# Altium PCB PCB1.PcbDoc
Units mm, origin at the board's own origin, x right, y up, seen from the top; angles counter-clockwise.
Board outline 30.73 x 53.09 mm, 2 copper layers (Top Layer, Bottom Layer); 47 components, 62 nets, 201 pads, 54 vias.
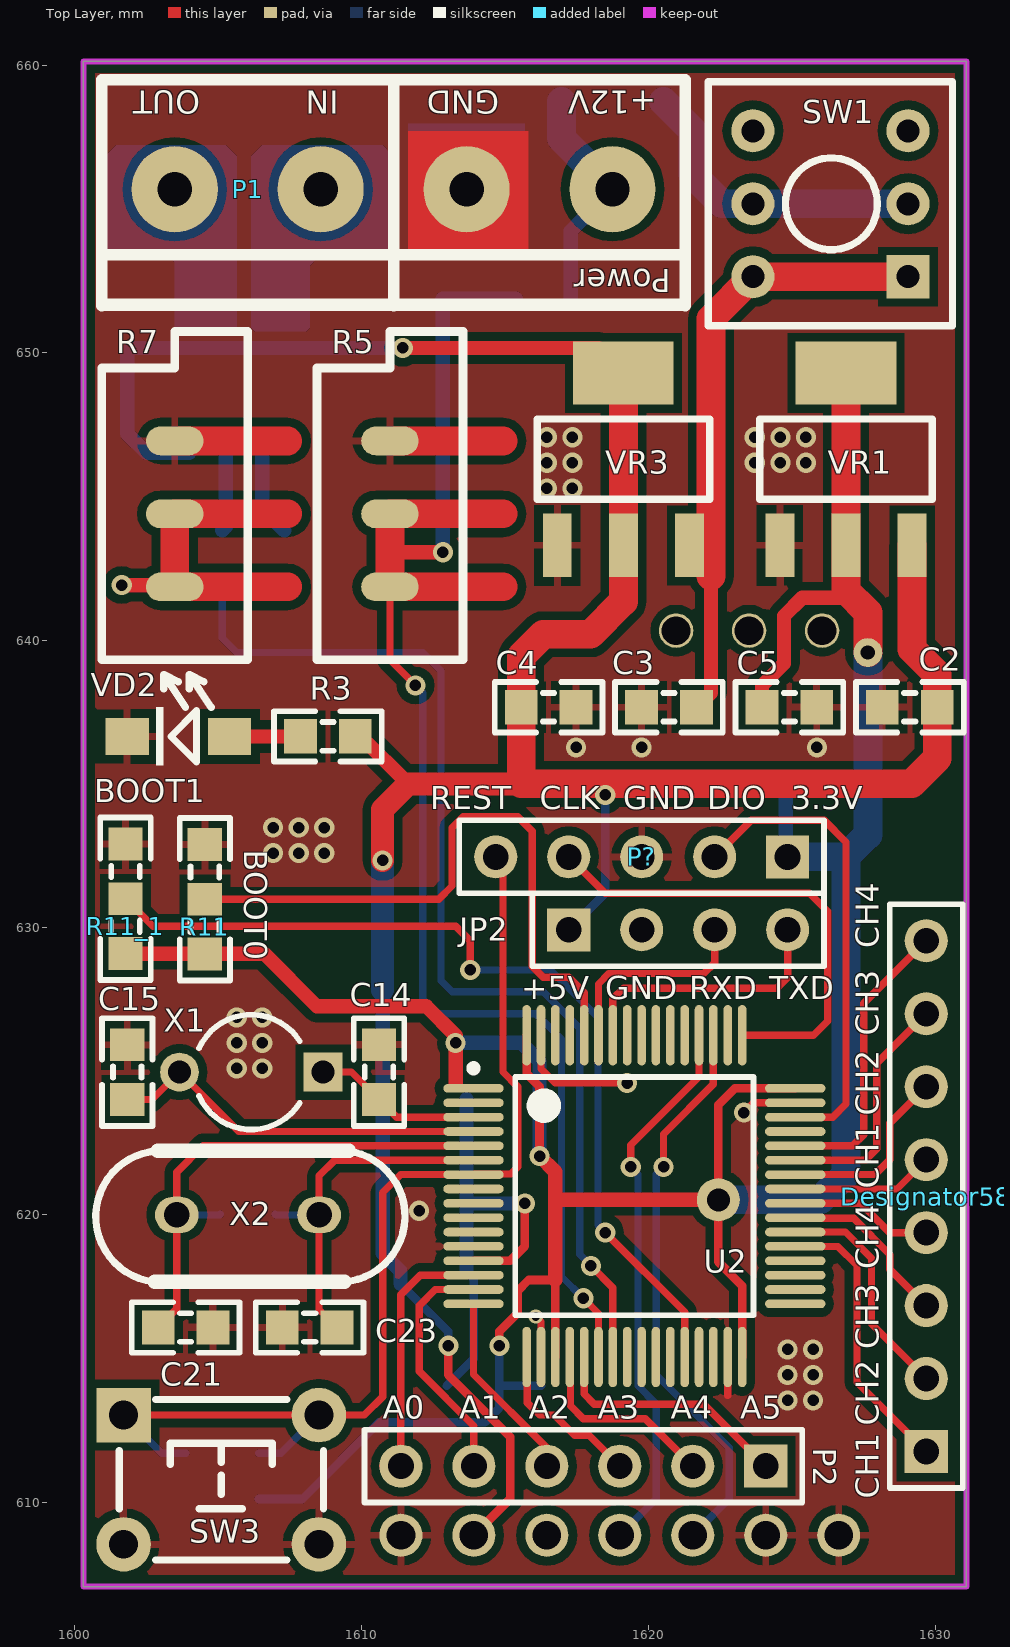
[diagram p0: Top Layer view]
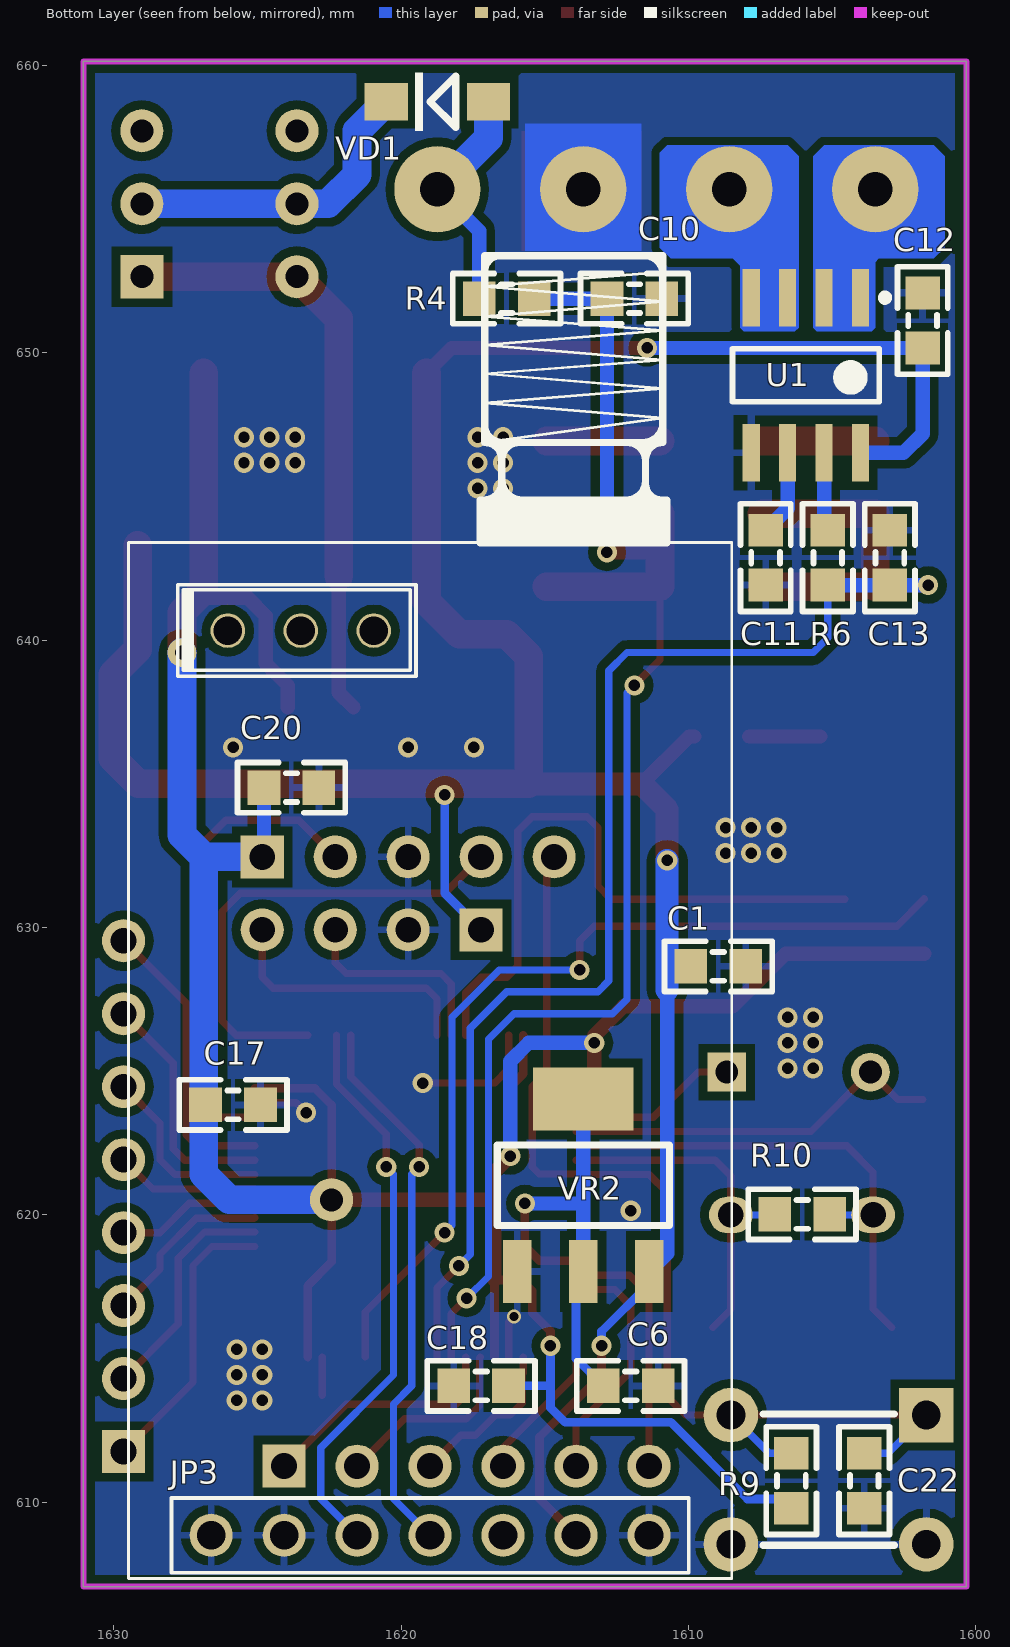
[diagram p1: Bottom Layer view, seen from below]

## Layer stack, top to bottom
Top Solder: solder mask 0.0102, Solder Resist, Dk 3.5
Top Layer: signal copper 0.0356
Dielectric1: dielectric 0.32, FR-4, Dk 4.8
Bottom Layer: signal copper 0.0356
Bottom Solder: solder mask 0.0102, Solder Resist, Dk 3.5

## Board outline
1600.327,607.06 1631.061,607.06 1631.061,660.146 1600.327,660.146

## Design rules (kind name [scope] priority, off if disabled: settings)
Clearance [All] p1: gap=0.2
PolygonConnect [All] p1: connectstyle=Relief reliefconductorwidth=0.254 reliefentries=4 polygonreliefangle="90 Angle" airgapwidth=0.254
RoutingVias [All] p1: holewidth=0.4 width=0.7 viastyle="Through Hole" minholewidth=0.2 minwidth=0.4 maxholewidth=0.7 maxwidth=1
SolderMaskExpansion [All] p1: expansion=0.102
Width [All] p1: maxlimit=2 minlimit=0.254 preferedwidth=0.254
30 further rules are at their usual default settings.

## Components (designator, comment, footprint, x,y, rotation, side; value= is the part's Value field where it differs from the comment)
BOOT0 "10k" 0805 1604.553,631.936 r90 top (schematic designator R2)
BOOT1 "10k" 0805 1601.79,631.952 r90 top (schematic designator R2)
C1 "104" 0805 1608.963,628.65 r180 bottom
C2 "104" 0805 1629.09,637.667 r180 top
C3 "104" 0805 1620.708,637.667 r180 top
C4 "104" 0805 1616.517,637.667 r0 top
C5 "104" 0805 1624.899,637.667 r0 top
C6 "104" 0805 1612.011,614.045 r180 bottom
C10 "104" 0805 1611.884,651.891 r180 bottom
C11 "1nF" 0805 1607.312,642.874 r270 bottom
C12 "104" 0805 1601.851,651.129 r270 bottom
C13 "104" 0805 1602.994,642.874 r90 bottom
C14 "10pf" 0805 1610.614,624.967 r270 top
C15 "10pf" 0805 1601.851,624.967 r270 top
C17 "104" 0805 1625.854,623.824 r0 bottom
C18 "104" 0805 1617.218,614.045 r180 bottom
C20 "104" 0805 1623.822,634.873 r0 bottom
C21 "22pf" 0805 1603.883,616.077 r0 top
C22 "104" 0805 1603.883,610.743 r270 bottom
C23 "22pf" 0805 1608.201,616.077 r180 top
Designator58 "Comment" HDR1X8 1629.664,611.759 r90 top
JP2 "HDR-1X4" HDR1X4 1617.218,629.92 r0 top
JP3 "HDR-1X7" 射频模块 1618.146,628.035 r90 bottom locked
P1 "Header 2" "2p 5.08" 1608.582,655.701 r180 top
P2 "Header 6" HDR1X6 1624.076,611.251 r180 top
P? "Header 5" HDR1X5 1624.838,632.46 r180 top
Power "HDR-1X2" "2p 5.08" 1618.742,655.701 r180 top
R3 "512" 0805 1608.836,636.651 r180 top
R4 "10k" 0805 1616.329,651.891 r180 bottom
R5 "RPot" 精密可调电位器 1610.995,646.938 r270 top (schematic designator R7)
R6 "2.2k" 0805 1605.153,642.874 r270 bottom
R7 "RPot" 精密可调电位器 1603.502,646.938 r270 top
R9 "10k" 0805 1606.423,610.743 r270 bottom
R10 "1M" 0805 1606.042,620.014 r0 bottom
R11 "10k" 0805 1604.553,630.031 r270 top (schematic designator R1)
R11_1 "10k" 0805 1601.79,630.047 r270 top (schematic designator R1)
SW1 "KET 7X7" BTN8.5*8.5 1629.029,652.653 r180 top
SW3 "6x6x5" 按钮 1601.724,613.029 r180 top
U1 "ACS712" "SOP8 - duplicate" 1605.915,649.224 r270 bottom
U2 "STM32F103RCT6" STM-LQFP64_M 1619.504,620.649 r0 top
VD1 "1N4007" DIODE_SOP 1616.964,658.749 r0 bottom
VD2 "1N4007" DIODE_SOP 1605.407,636.651 r180 top (schematic designator VD1)
VR1 "AMS1117-3.3" SOT-223 1626.87,646.303 r270 top
VR2 "AMS1117-3.3" SOT-223 1613.662,621.03 r270 bottom
VR3 "AMS1117-3.3" SOT-223 1619.123,646.303 r270 top (schematic designator VR1)
X1 "32.768K" CAPR5-4X5 1606.169,624.967 r180 top
X2 "8MHz" 直插晶振 1606.042,620.014 r0 top

## Footprints (in the part's own frame and the unit in brackets; to place one, negate y for a bottom-side part, rotate by r counter-clockwise, add the part's x,y. Pads: shape width x height; smd on the part's side, far side on the other; paste and mask are expansions set on the pad)
"2p 5.08" [mm]
  round 3 hole 1.2: 1(0,0) 2(5.08,0)
  silkscreen extent -2.6,-3.81 7.68,4.24
0805 [mm] "Chip Capacitor, 2-Leads, Body 2.0x1.2mm, IPC Medium Density"
  rect 1.14x1.2 smd: 1(-0.955,0) 2(0.955,0)
  silkscreen extent -0.2,-0.87 1.88,0.87, body extent -1,-0.6 1,0.6, height 0.5
BTN8.5*8.5 [mm]
  rect 1.5x1.5 hole 0.8: 1(0,0)
  round 1.5 hole 0.8: 2(0,-2.54) 3(0,-5.08) 4(5.4,-5.08) 5(5.4,-2.54) 6(5.4,0)
  silkscreen extent -1.55,-6.79 6.95,1.71
CAPR5-4X5 [mm] "Capacitor; 2 Leads"
  rect 1.35x1.35 hole 0.8: 1(-2.5,0)
  round 1.35 hole 0.8: 2(2.5,0)
  silkscreen extent -1.69,-2 1.82,2
DIODE_SOP [mm]
  rect 1.5x1.3 smd: 1(0,0) 2(3.556,0)
  silkscreen extent 1.14,-1.02 2.56,1.02
HDR1X4 [mm] "Connector; Header; 4 Position"
  rect 1.5x1.5 hole 0.9: 1(0,0)
  round 1.5 hole 0.9: 2(2.54,0) 3(5.08,0) 4(7.62,0)
  silkscreen extent -1.27,-1.27 8.89,1.27
HDR1X5 [mm] "Connector; Header; 5 Position"
  rect 1.5x1.5 hole 0.9: 1(0,0)
  round 1.5 hole 0.9: 2(2.54,0) 3(5.08,0) 4(7.62,0) 5(10.16,0)
  silkscreen extent -1.27,-1.27 11.43,1.27
HDR1X6 [mm] "Connector; Header; 6 Position"
  rect 1.5x1.5 hole 0.9: 1(0,0)
  round 1.5 hole 0.9: 2(2.54,0) 3(5.08,0) 4(7.62,0) 5(10.16,0) 6(12.7,0)
  silkscreen extent -1.27,-1.27 13.97,1.27
HDR1X8 [mm] "Connector; Header; 8 Position"
  rect 1.5x1.5 hole 0.9: 1(0,0)
  round 1.5 hole 0.9: 2(2.54,0) 3(5.08,0) 4(7.62,0) 5(10.16,0) 6(12.7,0) 7(15.24,0) 8(17.78,0)
  silkscreen extent -1.27,-1.27 19.05,1.27
"SOP8 - duplicate" [mm] "SOP, 8-Leads, Body 5.1x4.0mm (max), Pitch 1.27mm, IPC Medium Density"
  rect 2x0.6 smd: 1(-2.7,1.905) 2(-2.7,0.635) 3(-2.7,-0.635) 4(-2.7,-1.905) 5(2.7,-1.905) 6(2.7,-0.635) 7(2.7,0.635) 8(2.7,1.905)
  silkscreen extent -2.82,-2.55 0.92,2.88, body extent -2,-2.55 2,2.55, height 1.75
SOT-223 [mm]
  rect 2.2x1 smd: 1(3,-2.3) 2(3,0) 3(3,2.3)
  rect 2.2x3.5 smd: 2(-3,0)
  silkscreen extent -1.4,-3 1.4,3, body extent -3.49,-3.24 3.49,3.24, height 1.64
STM-LQFP64_M [mm] "Thin QFP, 64-Leads, Body 10x10mm, Pitch 0.5mm, IPC Low Density"
  oval 2.1x0.3 smd: 1(-5.6,3.75) 2(-5.6,3.25) 3(-5.6,2.75) 4(-5.6,2.25) 5(-5.6,1.75) 6(-5.6,1.25) 7(-5.6,0.75) 8(-5.6,0.25) 9(-5.6,-0.25) 10(-5.6,-0.75) 11(-5.6,-1.25) 12(-5.6,-1.75) 13(-5.6,-2.25) 14(-5.6,-2.75) 15(-5.6,-3.25) 16(-5.6,-3.75) 33(5.6,-3.75) 34(5.6,-3.25) 35(5.6,-2.75) 36(5.6,-2.25) 37(5.6,-1.75) 38(5.6,-1.25) 39(5.6,-0.75) 40(5.6,-0.25) 41(5.6,0.25) 42(5.6,0.75) 43(5.6,1.25) 44(5.6,1.75) 45(5.6,2.25) 46(5.6,2.75) 47(5.6,3.25) 48(5.6,3.75)
  oval 0.3x2.1 smd: 17(-3.75,-5.6) 18(-3.25,-5.6) 19(-2.75,-5.6) 20(-2.25,-5.6) 21(-1.75,-5.6) 22(-1.25,-5.6) 23(-0.75,-5.6) 24(-0.25,-5.6) 25(0.25,-5.6) 26(0.75,-5.6) 27(1.25,-5.6) 28(1.75,-5.6) 29(2.25,-5.6) 30(2.75,-5.6) 31(3.25,-5.6) 32(3.75,-5.6) 49(3.75,5.6) 50(3.25,5.6) 51(2.75,5.6) 52(2.25,5.6) 53(1.75,5.6) 54(1.25,5.6) 55(0.75,5.6) 56(0.25,5.6) 57(-0.25,5.6) 58(-0.75,5.6) 59(-1.25,5.6) 60(-1.75,5.6) 61(-2.25,5.6) 62(-2.75,5.6) 63(-3.25,5.6) 64(-3.75,5.6)
  silkscreen extent -5.72,-4.15 4.15,4.57, body extent -5,-5 5,5, height 1.6
射频模块 [mm]
  round 1.5 hole 1: 1(-19.191,-6.77) 2(-19.191,-4.23) 3(-19.191,-1.69) 4(-19.191,0.85) 5(-19.191,3.39) 6(-19.191,5.93) 7(-19.191,8.47)
  round 1.2 hole 1: a(12.299,2.81) a(12.299,5.35) a(12.299,7.89)
  silkscreen extent -20.7,-9.65 25.35,11.35
按钮 [mm]
  rect 1.9x1.9 hole 1: 1(0,0)
  round 1.9 hole 1: 2(0,4.5) 3(-6.8,4.5) 4(-6.8,0)
  silkscreen extent -6.96,-0.54 0.16,5.04, body extent -7.51,-0.75 0.71,5.25, height 5.95
直插晶振 [mil]
  oval 60x50 hole 35: 1(-97.13,-0.79) 2(97.87,-0.79)
  silkscreen extent -208,-93 216,87
精密可调电位器 [mm]
  oval 1x2 smd: 1(5.08,0) 2(2.54,0) 3(0,0)
  silkscreen extent -3.81,-2.54 7.62,2.54

## Part data
BOOT0 BOOT1 R3 R4 R6 R9 R10 R11 R11_1: library part R, "贴片电阻"
C1 C2 C3 C4 C5 C6 C10 C11 C12 C13 C14 C15 C17 C18 C20 C21 C22 C23: library part C, "无极性贴片电容"
JP2: library part "Header 4", "4P接插件"
JP3: library part "Header 7", "7P接插件"
P1: "Header, 2-Pin"
P2: "Header, 6-Pin"
P?: "Header, 5-Pin"
Power: library part "Header 2", "2P接插件"
R5 R7: "Potentiometer"
SW1: "7*7自锁开关"
SW3: library part "TSW DIP-6x6", "直插6x6轻触开关"
U2: "ARM Cortex-M3 32-bit MCU, 256 KB Flash, 48 KB Internal RAM, 51 I/Os, 64-pin LQFP, -40 to 85 degC, Tray"
VD1 VD2: "整流二极管"
VR1 VR2 VR3: library part "SOT-223 AMS1117-3.3", "低压差线性稳压(LDO)"
X1 X2: library part XTAL-2, "2脚晶振"

## Free pads (board coordinates)
  round 1 hole 0.5: 0(1627.632,639.572)
  round 1.5 hole 0.8: 1(1622.425,620.522)

## Via types
v1: diameter 0.7, hole 0.4, Top Layer to Bottom Layer, 53 vias
v2: diameter 0.5, hole 0.3, Top Layer to Bottom Layer, 1 vias

## Nets (pads, with @x,y where several pads share a name; then routed paths per layer and width w, separated by ;. In a path a pad name is that pad's centre, name@x,y a point inside that pad or via, vN(x,y) a via of type N, cw(c..) or ccw(c..) an arc to the next point about the centre after c; other vN are vias at no path point)
A0: P2.6 U2.14 | length 9
  Top Layer w0.254: P2.6@1610.741,611.251 1611.376,611.886 1611.376,617.22 1612.055,617.899 U2.14
A1: P2.5 U2.15 | length 8.5
  Top Layer w0.254: U2.15 1612.571,617.399 1612.011,616.839 1612.011,614.553 1613.916,612.648 P2.5
A2: P2.4 U2.16 | length 6.7
  Top Layer w0.254: U2.16 1613.904,614.438 1616.456,611.886 P2.4
A3: P2.3 U2.17 | length 5.7
  Top Layer w0.254: U2.17 1615.754,614.493 1615.777,614.47 1615.777,613.454 1616.202,613.029 1616.71,613.029 1617.418,612.321 1617.926,612.321 P2.3
A4: P2.2 U2.20 | length 6.8
  Top Layer w0.254: U2.20 1617.277,615.026 1617.277,613.351 1617.726,612.902 1619.885,612.902 P2.2
A5: P2.1 U2.21 | length 8.6
  Top Layer w0.254: U2.21 1617.754,613.763 1618.107,613.41 1621.917,613.41 P2.1
A6: C10.1 R4.2 R5.1 R5.2 U2.22 | length 55.9
  Top Layer w0.254: R5.1 1610.995,639.318 v1(1611.884,638.429) ; 1610.995,642.62 1610.995,643.001 ; v1(1617.726,617.093) 1618.254,616.565 U2.22
  Top Layer w0.5: 1610.995,643.001 1611.056,643.062 v1(1612.839,643.062)
  Top Layer w1: 1614.932,641.858 R5.1 1610.995,643.001 R5.2 1614.932,644.398
  Bottom Layer w0.254: v1(1611.884,638.429) 1612.138,638.175 1612.138,627.507 1612.646,626.999 1616.075,626.999 1616.964,626.11 1616.964,617.855 v1(1617.726,617.093)
  Bottom Layer w0.5: v1(1612.839,643.062) C10.1 R4.2
A7: C13.1 R6.2 R7.1 R7.2 U2.23 | length 53.9
  Top Layer w0.254: v1(1617.992,618.224) 1618.754,617.462 U2.23
  Top Layer w0.5: v1(1601.658,641.919) 1603.502,641.919 1603.949,641.919 R7.1@1604.01,641.858
  Top Layer w1: R7.1 1603.502,641.919 R7.2 1607.439,644.398 ; R7.1@1604.01,641.858 1607.439,641.858
  Bottom Layer w0.254: R6.2 1605.153,640.08 1605.661,639.572 1612.138,639.572 1612.773,638.937 1612.773,628.142 1613.154,627.761 1616.329,627.761 1617.599,626.491 1617.599,618.617 v1(1617.992,618.224)
  Bottom Layer w0.5: v1(1601.658,641.919) C13.1 R6.2
BOOT0: BOOT0.1 R11.1 U2.60 | length 22.4
  Top Layer w0.254: R11.1 1612.696,630.986 1613.154,631.444 1613.154,633.476 1613.535,633.857 1615.44,633.857 1615.948,633.349 1615.948,628.65 1616.329,628.269 1617.218,628.269 1617.754,627.733 U2.60
BOOT1: BOOT1.1 R11_1.1 U2.28 | length 32
  Top Layer w0.254: R11_1.1 1602.745,630.047 1613.281,630.047 1613.789,629.539 v1(1613.789,628.523) ; v1(1618.488,619.379) 1621.254,616.613 U2.28
  Bottom Layer w0.254: v1(1613.789,628.523) 1616.583,628.523 1618.234,626.872 1618.234,619.633 v1(1618.488,619.379) v1@1618.361,619.379
CLK: P?.4 U2.49 | length 16.8
  Top Layer w0.254: P?.4 1618.488,631.19 1625.6,631.19 1626.235,630.555 1626.235,626.745 1625.739,626.249 U2.49
DIO: P?.2 U2.46 | length 16.5
  Top Layer w0.254: P?.2 1623.568,633.73 1626.108,633.73 1626.87,632.968 1626.87,623.862 1626.407,623.399 U2.46
GND: BOOT0.2 BOOT1.2 C1.2 C2.2 C3.2 C4.2 C5.2 C6.2 C10.2 C11.2 C12.1 C13.2 C14.1 C15.1 C17.1 C18.1 C20.1 C21.2 C22.2 C23.2 JP2.2 JP3.1 JP3.6 JP3.7 P?.3 Power.2 R5.3 R7.3 SW3.2 SW3.3 U1.5 U2.12 U2.18 U2.31 U2.47 U2.63 VD2.2 VR1.1 VR2.1 VR3.1 | length 17
  Top Layer w0.254: v2(1616.075,616.458) 1616.254,616.279 U2.18 ; U2.63 1616.254,625.082 1616.75,624.586 v1(1619.25,624.586) ; 1622.754,613.716 U2.31 ; v1(1623.314,623.556) 1623.657,623.899 U2.47
  Top Layer w1: R7.3 1607.439,646.938 ; R5.3 1614.932,646.938
  other v1: 1624.838,613.537 1625.727,613.537 1624.838,614.426 1625.727,614.426 1624.838,615.315 1625.727,615.315 1612.011,620.141 1605.661,625.094 1606.55,625.094 1605.661,625.983 1606.55,625.983 1605.661,626.872 1606.55,626.872 1606.931,632.587 1607.82,632.587 1608.709,632.587 1606.931,633.476 1607.82,633.476 1608.709,633.476 1617.472,636.27 1619.758,636.27 1625.854,636.27 1616.456,645.287 1617.345,645.287 1616.456,646.176 1617.345,646.176 1623.695,646.176 1624.584,646.176 1625.473,646.176 1616.456,647.065 1617.345,647.065 1623.695,647.065 1624.584,647.065 1625.473,647.065
NetC11_1: C11.1 U1.6 | length 3
  Bottom Layer w0.5: U1.6 1606.55,644.591 C11.1
NetC14_2: C14.2 U2.3 X1.1 | length 5.9
  Top Layer w0.254: X1.1 1609.659,624.967 C14.2 1611.227,623.399 U2.3
NetC15_2: C15.2 U2.4 X1.2 | length 13.3
  Top Layer w0.254: C15.2 1602.714,624.012 X1.2 1605.737,622.899 U2.4
NetC21_1: C21.1 R10.1 U2.5 X2.1 | length 17.9
  Top Layer w0.254: C21.1 1603.575,616.724 X2.1 1603.575,621.484 1604.49,622.399 U2.5
  Bottom Layer w0.254: X2.1 1605.067,619.994 R10.1
NetC23_1: C23.1 R10.2 U2.6 X2.2 | length 12.7
  Top Layer w0.254: C23.1 1608.528,616.705 X2.2 1608.528,621.357 1609.07,621.899 U2.6
  Bottom Layer w0.254: R10.2 1607.017,619.994 X2.2
NetJP1_3: 
NetJP1_4: 
NetLED1_1: R3.2 VD2.1 | length 2.5
  Top Layer w0.5: VD2.1 R3.2
NetP1_1: P1.1 U1.3 U1.4
NetP1_2: P1.2 U1.1 U1.2
NetR6_1: R6.1 U1.7 | length 2.7
  Bottom Layer w0.5: R6.1 1605.28,643.956 U1.7
NetSW1_2: SW1.2 SW1.5 VD1.2 | length 10.9
  Bottom Layer w1: VD1.2 1621.536,657.733 1621.536,656.209 1622.552,655.193 SW1.5 SW1.2
PA12: U2.45
PB0: U2.26
PB1: U2.27
PB10: U2.29
PB11: U2.30
PB12: U2.33
PC0: U2.8
PC1: U2.9
PC2: U2.10
PC3: U2.11
PC4: U2.24
PC5: U2.25
REF: C6.1 U2.13 VR2.2 | length 16
  Top Layer w0.3: U2.13 1615.186,618.399 1615.694,618.907 v1(1615.694,620.395)
  Bottom Layer w0.3: C6.1 1613.916,614.995 1613.916,617.776 VR2.2@1613.662,618.03
  Bottom Layer w0.5: VR2.2@1613.662,618.03 1613.662,620.395 ; VR2.2@1613.662,624.03 1613.662,620.395 ; v1(1615.694,620.395) 1613.662,620.395
RESET: C22.1 P?.5 R9.1 SW3.1 SW3.4 U2.7 | length 37.9
  Top Layer w0.254: SW3.1 SW3.4 1610.106,613.029 1610.741,613.664 1610.741,620.776 1611.364,621.399 U2.7 1613.927,621.422 1615.197,621.422 1615.44,621.665 1615.44,624.459 1614.932,624.967 1614.932,632.206 P?.5
  Bottom Layer w0.254: SW3.1 1603.055,611.698 C22.1 ; R9.1 1607.193,611.698 SW3.4
RXD_1: JP2.3 U2.59 | length 7.3
  Top Layer w0.254: U2.59 1618.254,628.035 1618.615,628.396 1621.917,628.396 1622.298,628.777 JP2.3
RXD_3: JP3.4 U2.52 | length 19.3
  Top Layer w0.254: v1(1619.377,621.665) 1619.377,622.427 1621.754,624.804 U2.52
  Bottom Layer w0.254: JP3.4 1620.266,610.114 1620.266,613.41 1619.631,614.045 1619.631,621.411 v1(1619.377,621.665)
RXD_5: U2.54
SCL_1: U2.61
SDA_1: U2.62
SPI_MISO1: U2.56
SPI_MOSI1: U2.57
SPI_SCK1: U2.55
TIM1_CH1: Designator58.5 U2.41 | length 5
  Top Layer w0.254: U2.41 1628.644,620.899 Designator58.5
TIM1_CH2: Designator58.6 U2.42 | length 6.6
  Top Layer w0.254: U2.42 1627.874,621.399 1628.394,621.919 1628.394,623.189 Designator58.6
TIM1_CH3: Designator58.7 U2.43 | length 8.4
  Top Layer w0.254: U2.43 1627.539,621.899 1627.94,622.3 1627.94,625.275 Designator58.7
TIM1_CH4: Designator58.8 U2.44 | length 10.2
  Top Layer w0.254: U2.44 1627.096,622.399 1627.486,622.789 1627.486,627.361 Designator58.8
TIM3_CH1: Designator58.1 U2.37 | length 9.9
  Top Layer w0.254: U2.37 1626.588,618.899 1627.251,618.236 1627.251,614.172 Designator58.1
TIM3_CH2: Designator58.2 U2.38 | length 8
  Top Layer w0.254: U2.38 1626.85,619.399 1627.759,618.49 1627.759,616.204 Designator58.2
TIM3_CH3: Designator58.3 U2.39 | length 6.1
  Top Layer w0.254: U2.39 1625.127,619.876 1627.135,619.876 1628.394,618.617 1628.394,618.109 Designator58.3
TIM3_CH4: Designator58.4 U2.40 | length 5
  Top Layer w0.254: U2.40 1627.374,620.399 1628.394,619.379 Designator58.4
TXD_1: JP2.4 U2.58 | length 9.3
  Top Layer w0.254: U2.58 1618.754,627.519 1619.123,627.888 1624.457,627.888 1624.838,628.269 JP2.4
TXD_3: JP3.5 U2.51 | length 19.8
  Top Layer w0.254: v1(1620.52,621.665) 1620.52,622.808 1622.254,624.542 U2.51
  Bottom Layer w0.254: v1(1620.52,621.665) 1620.266,621.411 1620.266,614.426 1622.806,611.886 1622.806,610.114 JP3.5
TXD_5: U2.53
VB: Power.1 R4.1 VD1.1 | length 8.2
  Bottom Layer w0.5: R4.1 1617.284,654.243 Power.1
  Bottom Layer w1: VD1.1 1616.964,657.479 Power.1
VCC3.3: C5.1 C17.2 C18.2 C20.2 P?.1 pad.0 pad.1 R9.2 R11.2 R11_1.2 U2.1 U2.19 U2.32 U2.48 U2.64 VR1.2 | length 110.9
  Top Layer w0.3: v1(1614.805,615.442) 1614.805,615.95 1615.44,616.585 1615.44,617.347 1615.821,617.728 1616.754,617.728 U2.19 ; U2.64 1615.754,624.907 1616.202,624.459 v1(1616.202,622.046) ; U2.32 1623.254,617.534 1622.425,618.363 pad.1 1622.425,623.824 1623,624.399 U2.48
  Top Layer w0.5: R11_1.2 1606.616,629.092 1608.455,627.253 1612.265,627.253 1613.281,626.237 v1(1613.281,625.983) 1613.281,624.586 ; v1@1616.287,621.961 v1(1616.202,622.046) 1616.754,621.494 1616.754,620.522 ; 1616.754,617.728 1616.754,620.522 ; pad.1 1616.754,620.522 ; C5.1 1623.944,638.424 1624.711,639.191 1624.711,640.842 1625.346,641.477 1626.87,641.477
  Top Layer w1: VR1.2@1626.87,649.303 1626.87,643.303 1626.87,641.731 1627.632,640.969 pad.0
  Bottom Layer w0.3: R9.2@1606.423,610.108 1607.947,610.108 1610.614,612.775 1614.297,612.775 1614.805,613.283 1614.805,614.045 ; v1(1614.805,615.442) 1614.805,614.045 ; C18.2 1614.805,614.045
  Bottom Layer w0.5: v1(1613.281,625.983) 1615.567,625.983 1616.202,625.348 v1(1616.202,622.046) ; C20.2 1624.777,632.521 P?.1
  Bottom Layer w1: pad.1 1625.981,620.522 1626.87,621.411 1626.87,632.46 ; P?.1 1626.87,632.46 ; pad.0 1627.632,633.222 1626.87,632.46
VCC5: C1.1 C2.1 C4.1 C12.2 JP2.1 JP3.2 R3.1 U1.8 VR1.3 VR2.3 VR3.2 | length 103
  Top Layer w0.3: v1(1613.027,615.442) 1613.027,614.426 1615.186,612.267 1615.186,610.114 JP3.2
  Top Layer w0.5: R3.1 1609.979,636.651 1611.63,635 ; v1(1611.442,650.174) 1618.252,650.174 VR3.2@1619.123,649.303
  Top Layer w0.8: v1(1610.741,632.333) 1610.741,634.111 1611.63,635 1615.562,635
  Top Layer w1: VR3.2@1619.123,649.303 1619.123,643.303 1619.123,641.35 1617.98,640.207 1616.329,640.207 1615.562,639.44 C4.1 1615.562,635 1629.156,635 1630.045,635.889 C2.1 1630.045,638.81 1629.17,639.685 VR1.3
  Bottom Layer w0.3: VR2.3@1611.362,617.601 1613.027,615.936 v1(1613.027,615.442) ; JP2.1 1618.488,631.19 v1(1618.488,634.619)
  Bottom Layer w0.5: U1.8 1602.519,646.524 1601.851,647.192 C12.2 v1(1611.442,650.174) ; 1610.741,627.827 1610.741,618.651 VR2.3 VR2.3@1611.362,617.601
  Bottom Layer w0.8: 1610.741,627.827 v1(1610.741,632.333)
VCC12: C3.1 SW1.1 SW1.6 VR3.3 | length 21.2
  Top Layer w0.5: C3.1 1622.171,638.175 1622.171,642.239
  Top Layer w1: 1622.171,642.239 1622.171,651.195 SW1.6 SW1.1
pads on no net: JP3.3 JP3.a SW1.3 SW1.4 U2.2 U2.34 U2.35 U2.36 U2.50

## Polygon pours and split planes (outlines as drawn)
GND on Top Layer "Top Layer-No Net" (solid, remove dead copper, pour order 0): 1600.327,660.146 1631.061,660.146 1631.061,607.06 1600.327,607.06 1600.327,660.146
GND on Bottom Layer "Top Layer-No Net" (solid, remove dead copper, pour order 2): 1600.327,660.146 1631.061,660.146 1631.061,607.06 1600.327,607.06 1600.327,660.146

## Keep-outs
Keep-Out Layer:
  the board outline again, w0.2

## Other copper
Top Layer:
  rectangle net GND: 1611.63,653.542 1615.821,657.733
Bottom Layer:
  rectangle net GND: 1611.63,653.542 1615.694,657.987
  region net NetP1_2: 1605.28,657.225 1605.661,656.844 1605.661,650.875 1605.534,650.748 1603.629,650.748 1603.502,650.875 1603.502,653.161 1603.375,653.288 1601.47,653.288 1601.089,653.669 1601.089,656.844 1601.47,657.225
  region net NetP1_1: 1606.169,656.844 1606.55,657.225 1610.741,657.225 1610.995,656.971 1610.995,653.669 1610.614,653.288 1608.455,653.288 1608.201,653.034 1608.201,650.875 1608.074,650.748 1606.296,650.748 1606.169,650.875

## Silkscreen, mask and mechanical layers (free items; w line width, h text height)
Top Overlay:
  lines w0.25: 1603.121,638.302 1603.121,638.81 ; 1603.629,638.556 1603.121,638.81 ; 1603.883,637.667 1603.121,638.81 ; 1604.01,638.302 1604.01,638.81 ; 1604.518,638.556 1604.01,638.81 ; 1604.772,637.667 1604.01,638.81
  text "OUT" at 1604.391,659.13 h0.8 r180
  text "IN" at 1609.217,659.13 h0.8 r180
  text "GND" at 1614.805,659.13 h0.8 r180
  text "+12V" at 1620.266,659.13 h0.8 r180
  text "REST" at 1612.392,634.111 h0.8
  text "CLK" at 1616.202,634.111 h0.8
  text "GND" at 1619.123,634.111 h0.8
  text "DIO" at 1622.044,634.111 h0.8
  text "3.3V" at 1624.965,634.111 h0.8
  text "CH4" at 1628.013,629.285 h0.8 r90
  text "+5V" at 1615.567,627.507 h0.8
  text "GND" at 1618.488,627.507 h0.8
  text "RXD" at 1621.409,627.507 h0.8
  text "TXD" at 1624.203,627.507 h0.8
  text "CH3" at 1628.013,626.237 h0.8 r90
  text "CH2" at 1628.013,623.443 h0.8 r90
  text "CH1" at 1628.013,620.903 h0.8 r90
  text "CH4" at 1628.013,618.109 h0.8 r90
  text "CH3" at 1628.013,615.315 h0.8 r90
  text "A0" at 1610.741,612.902 h0.8
  text "A1" at 1613.408,612.902 h0.8
  text "A2" at 1615.821,612.902 h0.8
  text "A3" at 1618.234,612.902 h0.8
  text "A4" at 1620.774,612.902 h0.8
  text "A5" at 1623.187,612.902 h0.8
  text "CH2" at 1628.013,612.648 h0.8 r90
  text "CH1" at 1628.013,610.108 h0.8 r90
Top Solder:
  lines w1: 1603.375,641.858 1607.439,641.858 ; 1603.375,644.398 1607.439,644.398 ; 1603.375,646.938 1607.439,646.938 ; 1610.868,641.858 1614.932,641.858 ; 1610.868,644.398 1614.932,644.398 ; 1610.868,646.938 1614.932,646.938

## Dimensions
1600.327,660.146 to 1600.327,607.06 on Top Overlay
1600.327,607.06 to 1631.061,607.06 on Top Overlay